# Altium PCB 19VBuck_Polygon_Pour.PcbDoc
Units mil, origin at the board's own origin, x right, y up, seen from the top; angles counter-clockwise.
Board outline 3545 x 2815 mil, 2 copper layers (Top Layer, Bottom Layer); 17 components, 10 nets, 49 pads, 11 vias.
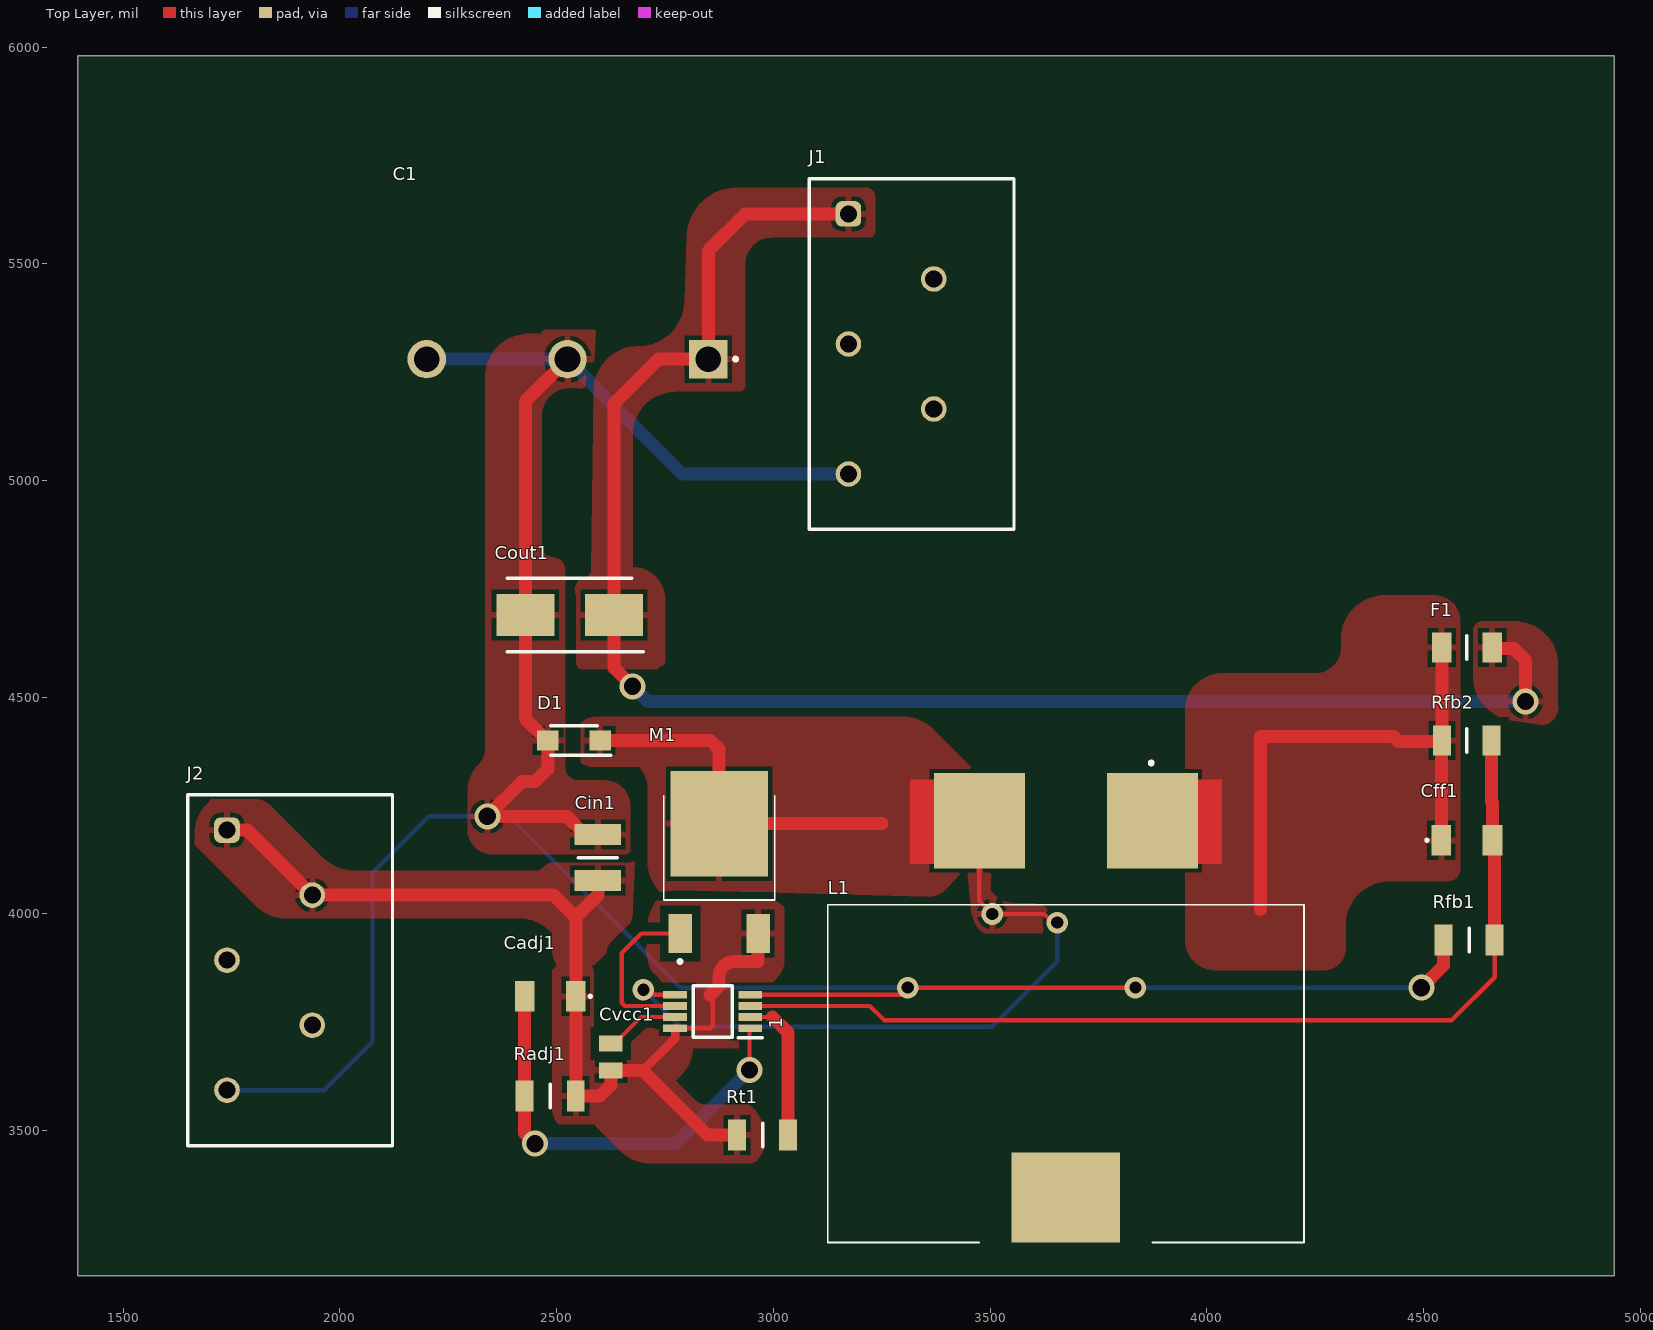
[diagram p0: Top Layer view]
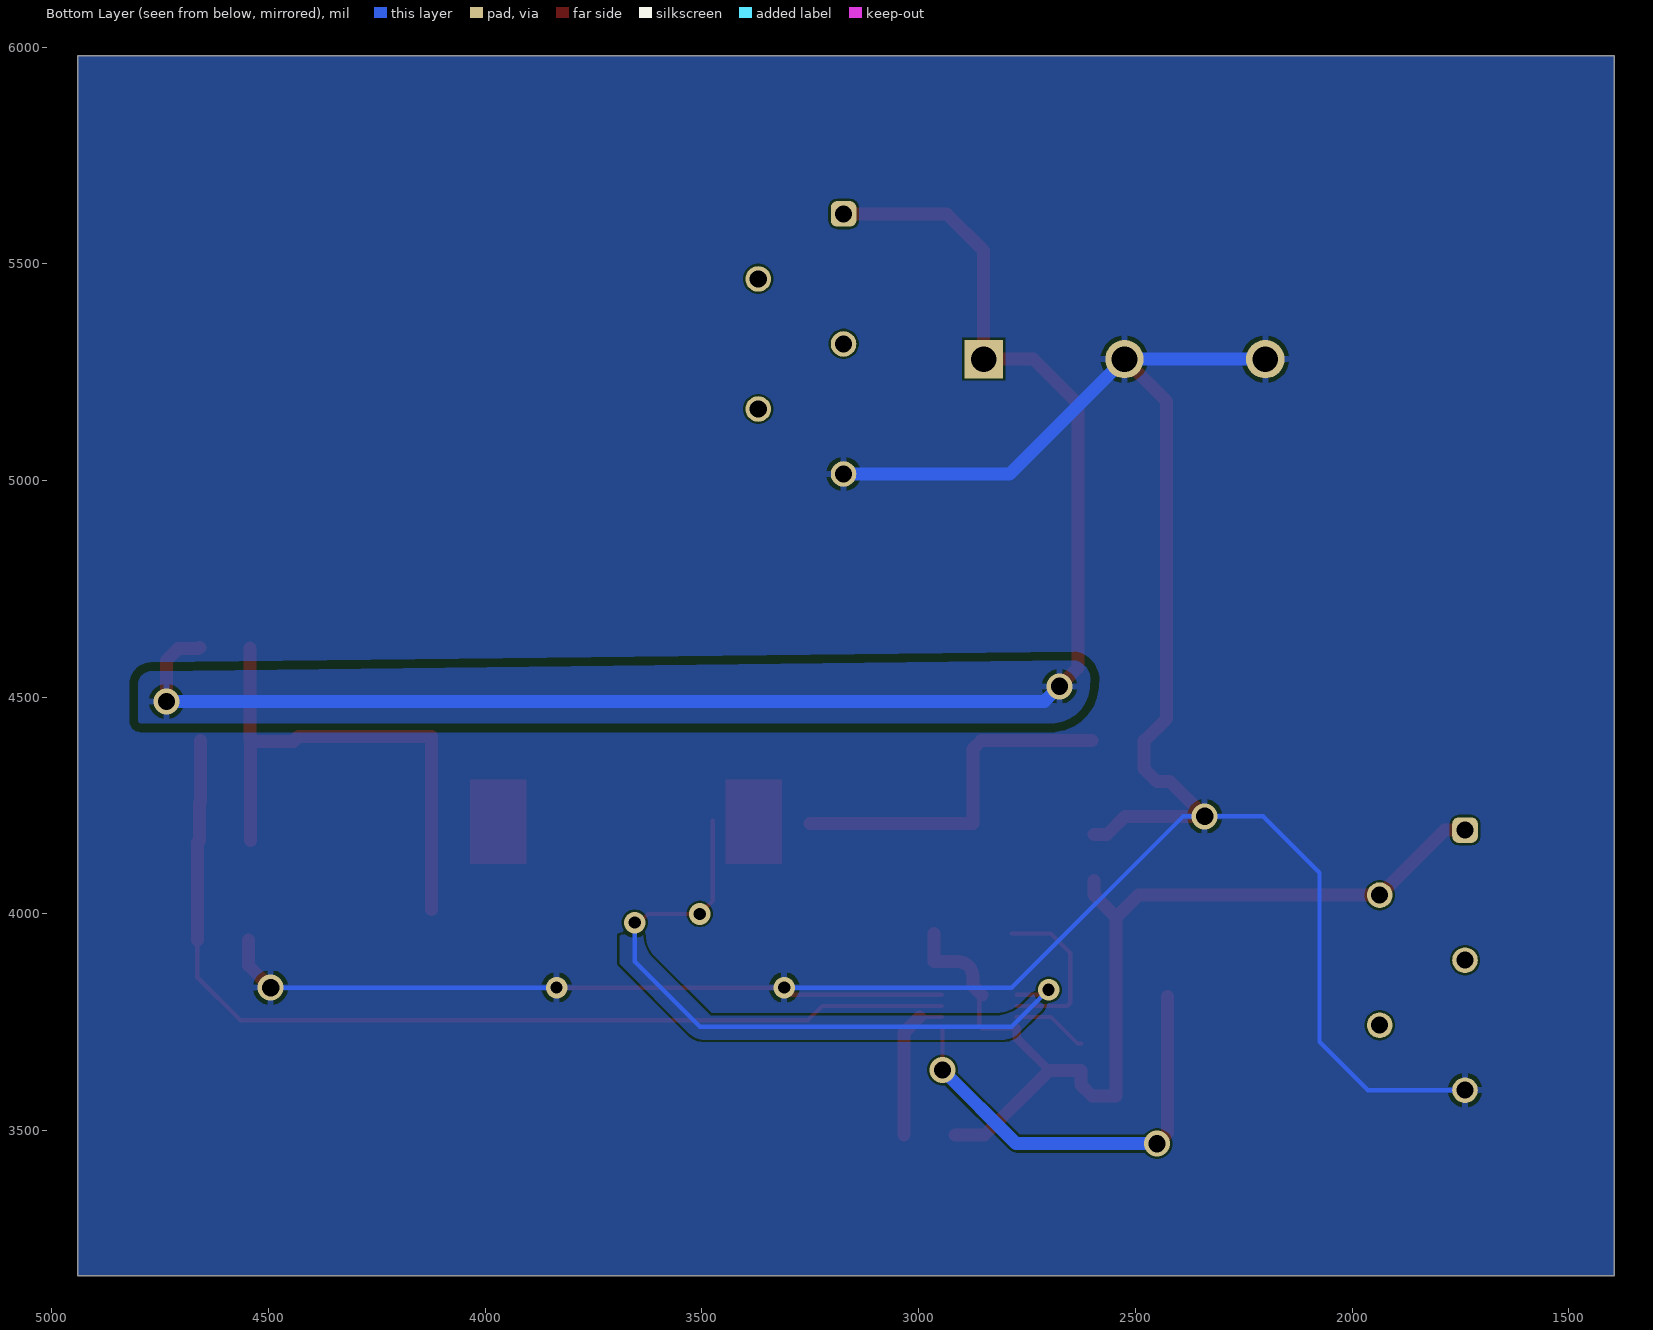
[diagram p1: Bottom Layer view, seen from below]
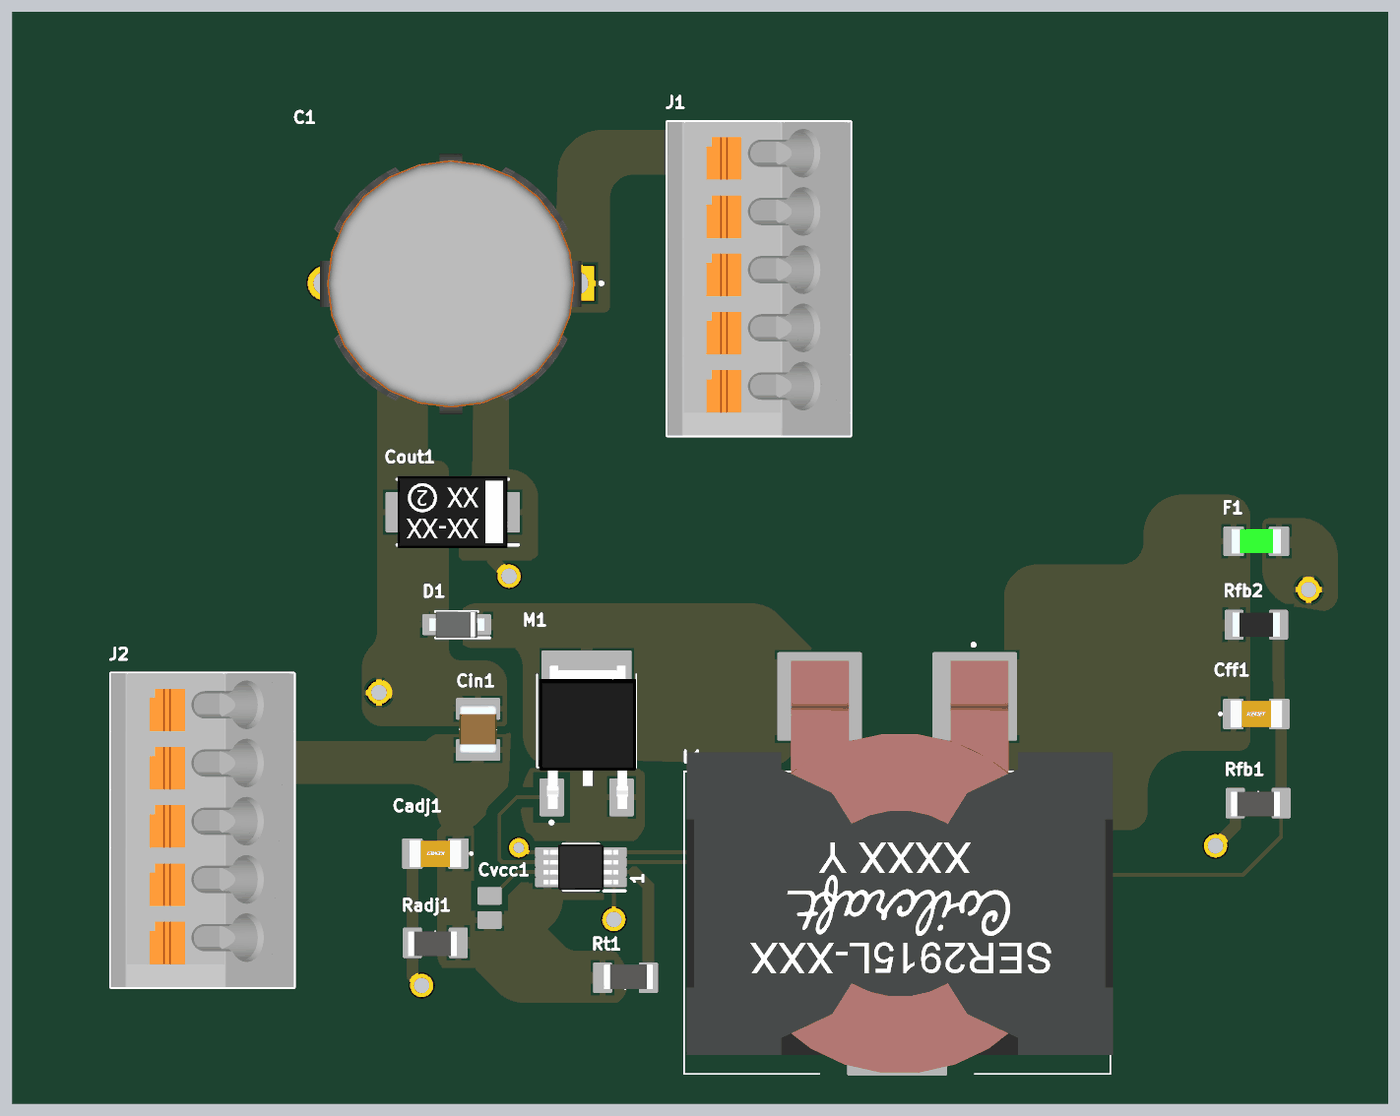
[diagram p2: 3D render of the assembled board from above, using the file's embedded part models]

## Layer stack, top to bottom
Top Solder: solder mask 0.4, Solder Resist, Dk 3.5
Top Layer: signal copper 1.4
Dielectric 1: dielectric 12.6, FR-4, Dk 4.8
Bottom Layer: signal copper 1.4
Bottom Solder: solder mask 0.4, Solder Resist, Dk 3.5

## Board outline
1395,3165 4940,3165 4940,5980 1395,5980

## Design rules (kind name [scope] priority, off if disabled: settings)
Clearance Clearance_POLY [InNamedPolygon('19V_L01_P026') OR InNamedPolygon('19V_L01_P032') OR InNamedPolygon('19V_L02_P033') OR InNamedPolygon('GND_L01_P035') OR InNamedPolygon('GND_L01_P043') OR InNamedPolygon('GND_L02_P044') OR InNamedPolygon('NETCFF1_1_L01_P029') OR InNamedPolygon('NETD1_1_L01_P021') OR InNamedPolygon('REC_VOLT_L01_P011') OR InNamedPolygon('REC_VOLT_L01_P012') OR InNamedPolygon('REC_VOLT_L01_P013') Or InNamedPolygon('REC_VOLT_L01_P017') Or InNamedPolygon('REC_VOLT_L01_P040') Or InNamedPolygon('REC_VOLT_L01_P041')] p1: gap=20 ignorepadtopadclearanceinfootprint=FALSE
Clearance [All] p2: gap=5 ignorepadtopadclearanceinfootprint=FALSE
Height [All] p1 off: minheight=0 maxheight=1000 prefheight=500
MinimumSolderMaskSliver [All] p1: minsoldermaskwidth=5
PasteMaskExpansion [All] p1: expansion=4
PolygonConnect [All] p1: connectstyle=Relief reliefconductorwidth=15 reliefentries=4 polygonreliefangle="90 Angle" airgapwidth=10
RoutingVias [All] p1: holewidth=28 width=50 viastyle="Through Hole" minholewidth=28 minwidth=50 maxholewidth=28 maxwidth=50
SilkToSilkClearance [All] p1: silktosilkclearance=5
SilkToSolderMaskClearance [IsPad] p1: minsilkscreentomaskgap=4 clearancetoexposedcopper=TRUE
SolderMaskExpansion [All] p1: expansion=4 istentingtop=FALSE
SupplyNets "Schematic Supply Nets" [InNet('19V')] p1: voltage=0.000
SupplyNets "Schematic Supply Nets_1" [InNet('GND')] p2: voltage=0.000
Width [All] p1: maxlimit=1000 minlimit=5 preferedwidth=10
25 further rules are at their usual default settings.

## Components (designator, comment, footprint, x,y, rotation, side; value= is the part's Value field where it differs from the comment)
1 "LM25085AMM_NOPB" SOP65P490X110-8N 2860,3775 r180 top
C1 "B40700A7148M002" B40700A7148M002 2849.8,5280 r90 top
Cadj1 "C1206C102K5GACTU" C1206 2485,3810 r180 top
Cff1 "" C1206 4600,4170 r0 top
Cin1 "MSASU32MSB5106KPNA01" CAPC3225X270N 2595,4130 r90 top
Cout1 "293D106X9063E2TE3" CAPPM7343X430N 2530,4690 r180 top
Cvcc1 "TMK212BJ474KD-T" CAPC2012X95N 2625,3670 r270 top
D1 "SS24FL" SODFL3617X108N 2540,4400 r180 top
F1 "0407006.WR" FUSC3216X98N 4600,4615 r0 top
J1 "691412320005M" 691412320005M 3318.82,5291.57 r90 top
J2 "691412320005M" 691412320005M 1885,3870 r90 top
L1 "SER2915L-153KL" SER2918H333KL 3674.8,3241.97 r180 top
M1 "SUD50P04-08-GE3" SIHD3N50DT4GE3 2875,4120 r0 top
Radj1 "CRCW12062K21FKEA" RESC3216X60N 2485,3580 r180 top
Rfb1 "CRCW1206499RFKEA" RESC3216X60N 4605,3940 r180 top
Rfb2 "RC1206FR-0710KL" RESC3116X65N 4600,4400 r0 top
Rt1 "CRCW1206665KFKEA" RESC3216X60N 2975,3490 r0 top

## Footprints (in the part's own frame and the unit in brackets; to place one, negate y for a bottom-side part, rotate by r counter-clockwise, add the part's x,y. Pads: shape width x height; smd on the part's side, far side on the other; paste and mask are expansions set on the pad)
691412320005M [mm] "3.81 mm Screwless 45¡ã Entry, 5p"
  rrect50% 1.5x1.5 hole 1: 1(8.215,3.7)
  round 1.5 hole 1: 2(4.405,-1.3) 3(0.595,3.7) 4(-3.215,-1.3) 5(-7.025,3.7)
  silkscreen extent -10.28,-6 10.28,6, body extent -10.27,-6 10.28,6, height 13.28
B40700A7148M002 [mm]
  rect 2.25x2.25 hole 1.5: 1(0,0)
  round 2.25 hole 1.5: 2(0,16.5) 3(0,8.25)
  silkscreen extent -0.1,-1.7 0.1,-1.5, body extent -8.6,-0.3 8.51,16.8, height 31.34
C1206 [mm]
  rect 1.15x1.8 smd: 1(-1.5,0) 2(1.5,0)
  silkscreen extent -2.4,-0.05 -2.3,0.05, body extent -1.7,-0.9 1.7,0.9, height 1.75
CAPC2012X95N [mm]
  rect 0.96x1.39 smd: 1(-0.79,0) 2(0.79,0)
CAPC3225X270N [mm]
  rect 1.22x2.72 smd: 1(-1.35,0) 2(1.35,0)
  silkscreen extent 0,-1.15 0,1.15, body extent -1.6,-1.25 1.6,1.25, height 2.7
CAPPM7343X430N [mm]
  rect 3.4x2.45 smd: 1(-2.6,0) 2(2.6,0)
  silkscreen extent -4.3,-2.15 3.65,2.15, body extent -3.59,-2.35 3.6,2.35, height 4.12
FUSC3216X98N [mm]
  rect 1.14x1.75 smd: 1(-1.48,0) 2(1.48,0)
  silkscreen extent 0,-0.69 0,0.69, body extent -1.6,-0.79 1.6,0.79, height 0.98
RESC3116X65N [mm]
  rect 1.05x1.75 smd: 1(-1.45,0) 2(1.45,0)
  silkscreen extent 0,-0.7 0,0.7, body extent -1.55,-0.8 1.55,0.8, height 0.65
RESC3216X60N [mm]
  rect 1.05x1.8 smd: 1(-1.5,0) 2(1.5,0)
  silkscreen extent 0,-0.7 0,0.7, body extent -1.42,-0.74 1.78,0.86, height 0.55
SER2918H333KL [mm]
  rect 5.33x5.59 smd: 1(-5.075,-24.715) 2(5.075,-24.715)
  rect 6.35x5.28 smd: 3(0,-2.64)
  silkscreen extent -13.95,-28.2 13.95,0, body extent -14.12,-27.06 13.78,-0.02, height 15.59
SIHD3N50DT4GE3 [mil]
  rect 55x90 smd: 1(-90,-165) 3(90,-165)
  rect 224.02x243.31 smd: 2(0,88.35)
  silkscreen extent -128,-234 128,152, body extent -123,-195 127,175, height 93
SODFL3617X108N [mm]
  rect 1.26x1.17 smd: 1(-1.525,0) 2(1.525,0)
  silkscreen extent -2.15,-0.86 1.38,0.86, body extent -1.8,-0.86 1.8,0.86, height 1.08
SOP65P490X110-8N [mm]
  rect 1.4x0.45 smd: 1(-2.2,0.975) 2(-2.2,0.325) 3(-2.2,-0.325) 4(-2.2,-0.975) 5(2.2,-0.975) 6(2.2,-0.325) 7(2.2,0.325) 8(2.2,0.975)
  silkscreen extent -2.9,-1.5 1.15,1.55, body extent -2.45,-1.5 2.45,1.5, height 1.1

## Part data
1: "Integrated Circuit", Manufacturer_Name="Texas Instruments", Manufacturer_Part_Number=LM25085AMM/NOPB, Mouser Part Number=926-LM25085AMM/NOPB, Datasheet Link=http://www.ti.com/lit/gpn/LM25085A, Height=1.1mm, Mouser Price/Stock=https://www.mouser.co.uk/ProductDetail/Texas-Instruments/LM25085AMM-NOPB?qs=X1J7HmVL2ZFzLd0kBZ%2FkDw%3D%3D
C1: "Capacitor Polarised", Manufacturer_Name=TDK, Datasheet Link=https://product.tdk.com/system/files/dam/doc/product/capacitor/aluminum-electrolytic/hybrid-polymer/data_sheet/20/30/db/aec/b40600_b40700.pdf, Height=33mm, Manufacturer_Part_Number=B40700A7148M002
Cadj1: "Capacitor", Manufacturer_Name=YAGEO, Datasheet Link=https://content.kemet.com/datasheets/KEM_C1003_C0G_SMD.pdf, Manufacturer_Part_Number=C1206C102K5GACTU
Cff1: library part C1206C333K5RACTU, "Capacitor", Manufacturer_Name=YAGEO, Mouser Part Number=80-C1206C333K5R, Datasheet Link=https://content.kemet.com/datasheets/KEM_C1002_X7R_SMD.pdf, Manufacturer_Part_Number=C1206C333K5RACTU, Mouser Price/Stock=https://www.mouser.com/Search/Refine.aspx?Keyword=80-C1206C333K5R
Cin1: "Capacitor", Manufacturer_Name="TAIYO YUDEN", Datasheet Link=https://4donline.ihs.com/images/VipMasterIC/IC/TAIY/TAIY-S-A0018972909/TAIY-S-A0018972909-1.pdf?hkey=61A2E4C270F0397D049F8F05BD4F1054, Height=2.7mm, Manufacturer_Part_Number=MSASU32MSB5106KPNA01
Cout1: "Capacitor Polarised", Manufacturer_Name=Vishay, Mouser Part Number=74-293D106X9063E2TE3, Arrow Part Number=293D106X9063E2TE3, Arrow Price/Stock=https://www.arrow.com/en/products/293d106x9063e2te3/vishay, Datasheet Link=http://www.vishay.com/docs/40002/293d.pdf, Height=4.3mm, Manufacturer_Part_Number=293D106X9063E2TE3, Mouser Price/Stock=https://www.mouser.co.uk/ProductDetail/Vishay-Sprague/293D106X9063E2TE3?qs=CPcc0c%2Fon9Gw9HhZerL1xQ%3D%3D
Cvcc1: "TAIYO YUDEN - TMK212BJ474KD-T - CERAMIC CAPACITOR 0.47UF, 25V, X5R, 10%, 0805", Manufacturer_Name="TAIYO YUDEN", Mouser Part Number=963-TMK212BJ474KD-T, Datasheet Link=https://componentsearchengine.com/Datasheets/2/TMK212BJ474KD-T.pdf, Geometry.Height=0.95mm, Manufacturer_Part_Number=TMK212BJ474KD-T, Mouser Price/Stock=https://www.mouser.co.uk/ProductDetail/TAIYO-YUDEN/TMK212BJ474KD-T?qs=PzICbMaShUcnyRLJVHq5%252BA%3D%3D
D1: "Schottky Diode", Manufacturer_Name=onsemi, Mouser Part Number=512-SS24FL, Arrow Part Number=SS24FL, Arrow Price/Stock=https://www.arrow.com/en/products/ss24fl/on-semiconductor?utm_currency=USD&region=europe, Datasheet Link=https://www.onsemi.com/pub/Collateral/SS26FL-D.PDF, Height=1.08mm, Manufacturer_Part_Number=SS24FL, Mouser Price/Stock=https://www.mouser.co.uk/ProductDetail/onsemi-Fairchild/SS24FL?qs=tqW9UTzndZyvT5hdH%252BfSxg%3D%3D
F1: "Fuse", Manufacturer_Name=LITTELFUSE, Mouser Part Number=576-0407006.WR, Arrow Part Number=0407006.WR, Arrow Price/Stock=https://www.arrow.com/en/products/0407006.wr/littelfuse?utm_currency=USD&region=nac, Datasheet Link=https://m.littelfuse.com/~/media/electronics/datasheets/littelfuse_fuse_407_datasheet.pdf.pdf, Height=0.985mm, Manufacturer_Part_Number=0407006.WR, Mouser Price/Stock=https://www.mouser.co.uk/ProductDetail/Littelfuse/0407006.WR?qs=sPbYRqrBIVmH0oD7q%252BOKfw%3D%3D
J1 J2: library part CMP-03913-78871500-2, "Terminal Block, 3.81MM Pitch, 45 Deg, Screwless, 16 -30 AWG, 5 Pins", Lead Pitch=3.81mm, Number of Pins=5, Packaging=Box
L1: "Inductor", Manufacturer_Name=COILCRAFT, Mouser Part Number=994-SER2915L-153KL, Datasheet Link=https://www.coilcraft.com/pdfs/ser2900.pdf, Height=17mm, Manufacturer_Part_Number=SER2915L-153KL, Mouser Price/Stock=https://www.mouser.co.uk/ProductDetail/Coilcraft/SER2915L-153KL?qs=zCSbvcPd3pYvEeXdEWrnlg%3D%3D
M1: "MOSFET (P-Channel)", Manufacturer_Name=Vishay, Mouser Part Number=781-SUD50P04-08-GE3, Arrow Part Number=SUD50P04-08-GE3, Arrow Price/Stock=https://www.arrow.com/en/products/sud50p04-08-ge3/vishay?region=europe, Datasheet Link=https://www.vishay.com/docs/65594/sud50p04-08.pdf, Height=2.38mm, Manufacturer_Part_Number=SUD50P04-08-GE3, Mouser Price/Stock=https://www.mouser.co.uk/ProductDetail/Vishay-Semiconductors/SUD50P04-08-GE3?qs=WX95TUc1y56BTDQkv3VCeQ%3D%3D
Radj1: "Resistor", Manufacturer_Name=Vishay, Mouser Part Number=71-CRCW1206-2.21K-E3, Arrow Part Number=CRCW12062K21FKEA, Arrow Price/Stock=https://www.arrow.com/en/products/crcw12062k21fkea/vishay, Datasheet Link=http://www.vishay.com/docs/20035/dcrcwe3.pdf, Height=0.6mm, Manufacturer_Part_Number=CRCW12062K21FKEA, Mouser Price/Stock=https://www.mouser.co.uk/ProductDetail/Vishay-Dale/CRCW12062K21FKEA?qs=v%252BxIQaJyuQoaBZMU5qB9Lw%3D%3D
Rfb1: "Resistor", Manufacturer_Name=Vishay, Mouser Part Number=71-CRCW1206-499-E3, Datasheet Link=http://www.vishay.com/docs/20035/dcrcwe3.pdf, Height=0.6mm, Manufacturer_Part_Number=CRCW1206499RFKEA, Mouser Price/Stock=https://www.mouser.com/Search/Refine.aspx?Keyword=71-CRCW1206-499-E3
Rfb2: "Resistor", Manufacturer_Name=YAGEO, Mouser Part Number=603-RC1206FR-0710KL, Arrow Part Number=RC1206FR-0710KL, Arrow Price/Stock=https://www.arrow.com/en/products/rc1206fr-0710kl/yageo?utm_currency=USD&region=europe, Datasheet Link=https://www.yageo.com/upload/media/product/app/datasheet/rchip/pyu-rc_group_51_rohs_l.pdf, Height=0.65mm, Manufacturer_Part_Number=RC1206FR-0710KL, Mouser Price/Stock=https://www.mouser.co.uk/ProductDetail/YAGEO/RC1206FR-0710KL?qs=%252BhB4WxZmbVEJV82xdVgRUw%3D%3D
Rt1: "Resistor", Manufacturer_Name=Vishay, Height=0.6mm, Manufacturer_Part_Number=CRCW1206665KFKEA

## Via types
v1: diameter 60, hole 40, Top Layer to Bottom Layer, 6 vias
v2: diameter 50, hole 28, Top Layer to Bottom Layer, 5 vias

## Nets (pads, with @x,y where several pads share a name; then routed paths per layer and width w, separated by ;. In a path a pad name is that pad's centre, name@x,y a point inside that pad or via, vN(x,y) a via of type N, cw(c..) or ccw(c..) an arc to the next point about the centre after c; other vN are vias at no path point)
19V: C1.1 Cout1.1 F1.2 J1.1 | length 3797.1
  Top Layer w30: v1(2675,4525) 2632.36,4567.64 Cout1.1 2632.36,5177.36 2735,5280 C1.1 2849.8,5529.8 2935,5615 J1.1 ; F1.2 4661.4,4611.86 4708.14,4611.86 4735,4585 v1(4735,4490)
  Bottom Layer w30: v1(2675,4525) 2710,4490 v1(4735,4490)
FB_Pin: 1.3 Cff1.2 Rfb1.1 Rfb2.2 | length 2320.9
  Top Layer w10: 1.3 3222.2,3787.8 3255,3755 4565,3755 4664.06,3854.06 Rfb1.1 ; 4657.09,4257.91 4659.06,4255.94 ; Cff1.2 Cff1.2@4664.06,4165
  Top Layer w30: 4657.09,4257.91 Rfb2.2 ; Cff1.2 4659.06,4255.94 ; Rfb1.1 Cff1.2@4664.06,4165
GND: 1.4 C1.2 C1.3 Cin1.2 Cout1.2 D1.2 J1.5 J2.5 Rfb1.2 | length 6452.5
  Top Layer w10: D1.2@2478.19,4400 D1.2 ; 1.4 v2@3310,3813.39 ; v2(3310,3830) v2(3835,3830)
  Top Layer w30: D1.2@2478.19,4400 2427.64,4450.55 Cout1.2 2427.64,5182.64 C1.3 ; D1.2 2479.96,4334.96 2450,4305 2420,4305 v1(2340,4225) 2523.62,4225 2565.47,4183.15 Cin1.2 ; v1(4495,3830) 4545.94,3880.94 Rfb1.2
  Bottom Layer w10: J2.5 1963.43,3593.43 2075,3705 2075,4095 2205,4225 v1(2340,4225) 2390,4225 2785,3830 v2(3310,3830) ; v2(3835,3830) v1(4495,3830)
  Bottom Layer w30: C1.2 C1.3 2790,5015 J1.5
ISEN: 1.5 D1.1 L1.2 M1.2 | length 2441.6
  Top Layer w10: v2(2700,3825) 2712.5,3825 2724.11,3813.39 1.5 ; 3251.01,4208.35 ccw(c3251.01,4213.99) 3255,4210 ; L1.2 3475,4030 v2(3505,4000) 3624.18,4000 3644.18,3980 v2(3655,3980)
  Top Layer w30: D1.1 2855,4400 2875,4380 M1.2 3251.01,4208.35
  Bottom Layer w10: v2(2700,3825) 2785,3740 3505,3740 3655,3890 v2(3655,3980)
Net1_1: 1.1 Cadj1.2 Radj1.2 | length 1012.7
  Top Layer w10: v1(2945,3640) 2945,3735 1.1
  Top Layer w30: Cadj1.2 Radj1.2 2425.94,3494.06 v1(2450,3470)
  Bottom Layer w30: v1(2450,3470) 2775,3470 v1(2945,3640)
Net1_2: 1.2 Rt1.2 | length 338.4
  Top Layer w10: 1.2 2997.8,3762.2
  Top Layer w30: 2997.8,3762.2 3034.06,3725.94 Rt1.2
Net1_6: 1.6 M1.1 | length 395
  Top Layer w10: 1.6 2657.2,3787.8 2650,3795 2650,3910 2695,3955 M1.1
Net1_7: 1.7 Cvcc1.1 | length 173.7
  Top Layer w10: Cvcc1.1 2633.46,3701.1 2694.57,3762.2 1.7
NetCff1_1: Cff1.1 F1.1 L1.1 Rfb2.1 | length 1264.9
  Top Layer w10: F1.1 F1.1@4542.91,4613.82
  Top Layer w30: 4124.09,4010.2 4124.09,4409.8 4430.2,4409.8 4441.97,4398.03 4540.94,4398.03 Cff1.1 ; Rfb2.1 F1.1@4542.91,4613.82
REC_Volt: 1.8 Cadj1.1 Cin1.1 Cvcc1.2 J2.1 J2.2 M1.3 Radj1.1 Rt1.1 | length 2392.1
  Top Layer w10: 1.8 2854.14,3736.61 2860,3742.47 2860,3807.53
  Top Layer w20: 2698.9,3638.9 2773.39,3713.39 1.8
  Top Layer w30: J2.1 1786.18,4193.43 J2.2 2492.87,4043.43 2544.06,3992.24 ; Cin1.1 2595,4043.19 2544.06,3992.24 ; 2854.14,3813.39 2875,3834.24 2875,3855.86 cw(c2909.14,3855.86) 2885,3880 cw(c2909.14,3855.86) 2909.14,3890 2965,3890 M1.3 ; Rt1.1 2847.8,3490 2698.9,3638.9 Cvcc1.2 2625,3605 2600,3580 Radj1.1 Cadj1.1 2544.06,3992.24
pads on no net: J1.2 J1.3 J1.4 J2.3 J2.4 L1.3

## Polygon pours and split planes (outlines as drawn)
ISEN on Top Layer "ISEN_L01_P047" (solid, remove dead copper, pour order 47): 3455,4020.36 ccw(c3540.35,4020.35) 3480,3960 ccw(c3492.07,3972.07) 3492.07,3955 3620,3955 ccw(c3590.87,3967.07) 3620,3979.14 3635,4010 ccw(c3591.29,3955.69) 3583.79,4025 3555,4025 cw(c3555,4085.36) 3512.32,4042.68 3500,4055 3505.18,4122.5 3502.75,4126.01 ccw(c3484.07,4094.53) 3475,4130 ccw(c3466.2,4105.06) 3457.39,4130 3445,4130
GND on Top Layer "GND_L01_P043" (solid, remove dead copper, pour order 43): 2295,4260.9 2295,4284.64 cw(c2380.36,4284.64) 2320,4345 ccw(c2283.79,4381.21) 2335,4381.21 2335,4465.63 2347.95,4465.63 cw(c2347.95,4365.63) 2418.66,4436.34 2425,4430 cw(c2400.86,4405.86) 2435,4405.86 2435,4335 2390.19,4290.19 cw(c2319.48,4360.9) 2319.48,4260.9
REC_Volt on Top Layer "REC_VOLT_L01_P041" (solid, remove dead copper, pour order 41): 1700,4260 1694.29,4254.29 ccw(c1765,4183.58) 1665,4183.58 1665,4160 1805.71,4019.29 ccw(c1876.42,4090) 1876.42,3990 2413.58,3990 cw(c2413.58,3890) 2484.29,3960.71 2490,3955 2490,3918.28 ccw(c2558.28,3918.28) 2510,3870 2546.72,3870 ccw(c2546.72,3938.28) 2595,3890 2645.71,3940.71 ccw(c2575,4011.42) 2675,4011.42 2680,4125 2660,4125 ccw(c2642.5,4082.76) 2625,4125 2520.36,4125 ccw(c2520.35,4039.65) 2460,4100 2031.42,4100 cw(c2031.42,4200) 1960.71,4129.29 1840,4250 ccw(c1803.79,4213.79) 1803.79,4265 1695,4265
REC_Volt on Top Layer "REC_VOLT_L01_P040" (solid, remove dead copper, pour order 40): 2746.87,3746.92 ccw(c2746.86,3735.88) 2735.83,3735.88 2725,3700 2810,3700 ccw(c2802.14,3798.12) 2900.26,3805.97 ccw(c2897.68,3792.43) 2884.13,3795 2850,3795 ccw(c2837.5,3782.5) 2825,3795 2825,3760 cw(c2813.7,3760) 2813.7,3748.7 2748.65,3748.7 ccw(c2748.65,3746.92)
GND on Top Layer "GND_L01_P035" (solid, remove dead copper, pour order 35): 2435,5338.02 ccw(c2435,5238.02) 2335,5238.02 2335,4473.02 ccw(c2410,4473.02) 2410,4398.02 cw(c2410,4373.02) 2435,4373.02 2435,4363.36 cw(c2405,4363.02) 2405,4333.02 2375,4333.02 ccw(c2375,4253.02) 2295,4253.02 2295,4193.02 ccw(c2350,4193.02) 2350,4138.02 2660,4138.02 ccw(c2660,4148.02) 2670,4148.02 2670,4248.02 ccw(c2610,4248.02) 2610,4308.02 2550,4308.02 cw(c2550,4338.02) 2520,4338.02 2520,4793.02 ccw(c2490,4793.02) 2490,4823.02 cw(c2490,4848.02) 2465,4848.02 2465,5148.02 cw(c2530,5148.02) 2530,5213.02 2545,5213.02 ccw(c2552.5,5245.52) 2585,5238.02 2590,5347.9 2476.55,5347.9 ccw(c2475,5338.02) 2465,5338.02
19V on Top Layer "19V_L01_P032" (solid, remove dead copper, pour order 32): 4710,4675 cw(c4710,4575) 4810,4575 4810,4485 cw(c4767.5,4477.5) 4775,4435 4715,4445 cw(c4717.5,4547.5) 4615,4550 4615,4655 cw(c4635,4655) 4635,4675
NetCff1_1 on Top Layer "NETCFF1_1_L01_P029" (solid, remove dead copper, pour order 29): 4035,4555 ccw(c4035,4470) 3950,4470 3950,3940 ccw(c4020,3940) 4020,3870 4270,3870 ccw(c4270,3920) 4320,3920 4320,3975 cw(c4420,3975) 4420,4075 4555,4075 ccw(c4555,4105) 4585,4105 4585,4675 ccw(c4525,4675) 4525,4735 4410,4735 ccw(c4410,4635) 4310,4635 4310,4615 cw(c4250,4615) 4250,4555 4075,4555
19V on Top Layer "19V_L01_P026" (solid, remove dead copper, pour order 26): 2795,5415 cw(c2690.01,5414.99) 2690,5310 ccw(c2690,5205) 2585,5205 2580,4795 cw(c2560,4795) 2560,4775 ccw(c2572.49,4747.5) 2545,4735 2545,4580 ccw(c2560,4580) 2560,4565 2730,4565 ccw(c2730,4570) 2735,4570 ccw(c2735,4585) 2750,4585 2750,4725 ccw(c2675,4725) 2675,4800 2675,5105 cw(c2775,5105) 2775,5205 2920,5205 ccw(c2920,5220) 2935,5220 2935,5500 cw(c2995,5500) 2995,5560 3220,5560 ccw(c3220,5575) 3235,5575 3235,5655 ccw(c3215,5655) 3215,5675 2915,5675 ccw(c2915,5560) 2800,5560
ISEN on Top Layer "ISEN_L01_P021" (solid, remove dead copper, pour order 21): 2591.21,4455 ccw(c2591.21,4403.79) 2555,4440 2555,4350 ccw(c2579.14,4374.14) 2579.14,4340 2690,4340 cw(c2641.72,4291.72) 2710,4291.72 2710,4121.42 ccw(c2810,4121.42) 2739.29,4050.71 2776.42,4055 3358.79,4040 ccw(c3358.79,4091.21) 3395,4055 3435.71,4095.71 ccw(c3365,4166.42) 3465,4166.42 3465,4330 3369.29,4425.71 ccw(c3298.58,4355) 3298.58,4455 2655,4455
REC_Volt on Top Layer "REC_VOLT_L01_P017" (solid, remove dead copper, pour order 17): 2729.97,4030.86 ccw(c2884.38,3938.65) 2745,3825 ccw(c2894.59,3714.18) 2710,3690 2990,3690 ccw(c2816.03,3747.93) 2980,3830 2985,3835 ccw(c2951.9,3902.85) 3023.28,3878.28 3025,3880 3025,3995 3025,4014.12 ccw(c2992.33,3992.37) 3000,4030.86
REC_Volt on Top Layer "REC_VOLT_L01_P013" (solid, remove dead copper, pour order 13): 2764.45,3750.42 ccw(c2764.45,3704.46) 2731.96,3736.96 2701.01,3741.01 ccw(c2722.94,3688.07) 2670,3710 cw(c2613.62,3709.57) 2653.79,3670 2592.96,3670 ccw(c2592.96,3662.48) 2587.64,3667.8 ccw(c2606.08,3649.36) 2580,3649.36 2580,3603.11 ccw(c2587.5,3610.61) 2587.5,3600 2760,3600 2784.47,3624.47 ccw(c2713.77,3695.18) 2813.76,3695.19 2813.76,3736.61 ccw(c2802.61,3736.61) 2810.5,3744.5 2810,3745 ccw(c2797.93,3732.93) 2797.93,3750 2765,3750
REC_Volt on Top Layer "REC_VOLT_L01_P012" (solid, remove dead copper, pour order 12): 2600.53,3753.5 ccw(c2680.48,3695.43) 2585,3670 2580,3541.21 ccw(c2631.21,3541.21) 2595,3505 2645.71,3454.29 ccw(c2716.42,3525) 2716.42,3425 2947.93,3425 ccw(c2947.93,3442.07) 2960,3430 2962.32,3432.32 ccw(c2919.65,3475) 2980,3475 2980,3483.58 ccw(c2880.01,3483.58) 2950.71,3554.29 2950,3555 ccw(c2937.93,3542.94) 2937.93,3560 2845,3560 cw(c2845,3596.21) 2819.39,3570.61 2725,3665 ccw(c2708.67,3653.24) 2711.89,3673.11 2654.84,3741.8
REC_Volt on Top Layer "REC_VOLT_L01_P011" (solid, remove dead copper, pour order 11): 2490,3870 2490,3551.21 ccw(c2541.21,3551.21) 2505,3515 2583.58,3515 ccw(c2583.58,3615) 2654.29,3544.29 2665,3555 ccw(c2640.86,3579.14) 2675,3579.14 2675,3633.79 ccw(c2623.79,3633.79) 2660,3670 2585,3670 2585,3867.93 ccw(c2567.93,3867.93) 2580,3880 ccw(c2555.86,3855.86) 2555.86,3890 2515,3890 ccw(c2515,3877.93) 2506.46,3886.46
GND on Bottom Layer "GND_L02_P049" (solid, remove dead copper, pour order 49): 1395,3165 4940,3165 4940,5980 1395,5980
ISEN on Bottom Layer "ISEN_L02_P045" (solid, remove dead copper, pour order 45): 2710,3790 ccw(c2740.18,3797.5) 2724.14,3770.86 2770,3725 ccw(c2806.21,3761.21) 2806.21,3710 3495,3710 ccw(c3495,3758.28) 3529.14,3724.14 3690,3885 3690,3950 ccw(c3672.5,3907.77) 3655,3950 3635,3955 cw(c3562.59,3949.99) 3617.32,3902.32 3480,3765 2826.42,3765 cw(c2826.42,3865) 2755.71,3794.29 2735,3815
19V on Bottom Layer "19V_L02_P033" (solid, remove dead copper, pour order 33): 2640,4585 ccw(c2650,4540) 2605,4530 ccw(c2695,4530) 2695,4440 4795,4440 ccw(c4795,4445) 4800,4445 4800,4530 ccw(c4770,4530) 4770,4560

## Other copper
Top Layer:
  region net NetCff1_1: 4034.61,4310 3904.61,4310 3904.61,4115 4034.61,4115
  rectangle net ISEN: 3315,4115 3445,4310